# Altium PCB EEG_F4.PcbDoc
Units mil, origin at the board's own origin, x right, y up, seen from the top; angles counter-clockwise.
Board outline 3937.01 x 3149.61 mil, 2 copper layers (Top Layer, Bottom Layer); 136 components, 108 nets, 645 pads, 0 vias.
Unrouted connection lines stored in the file: 354.
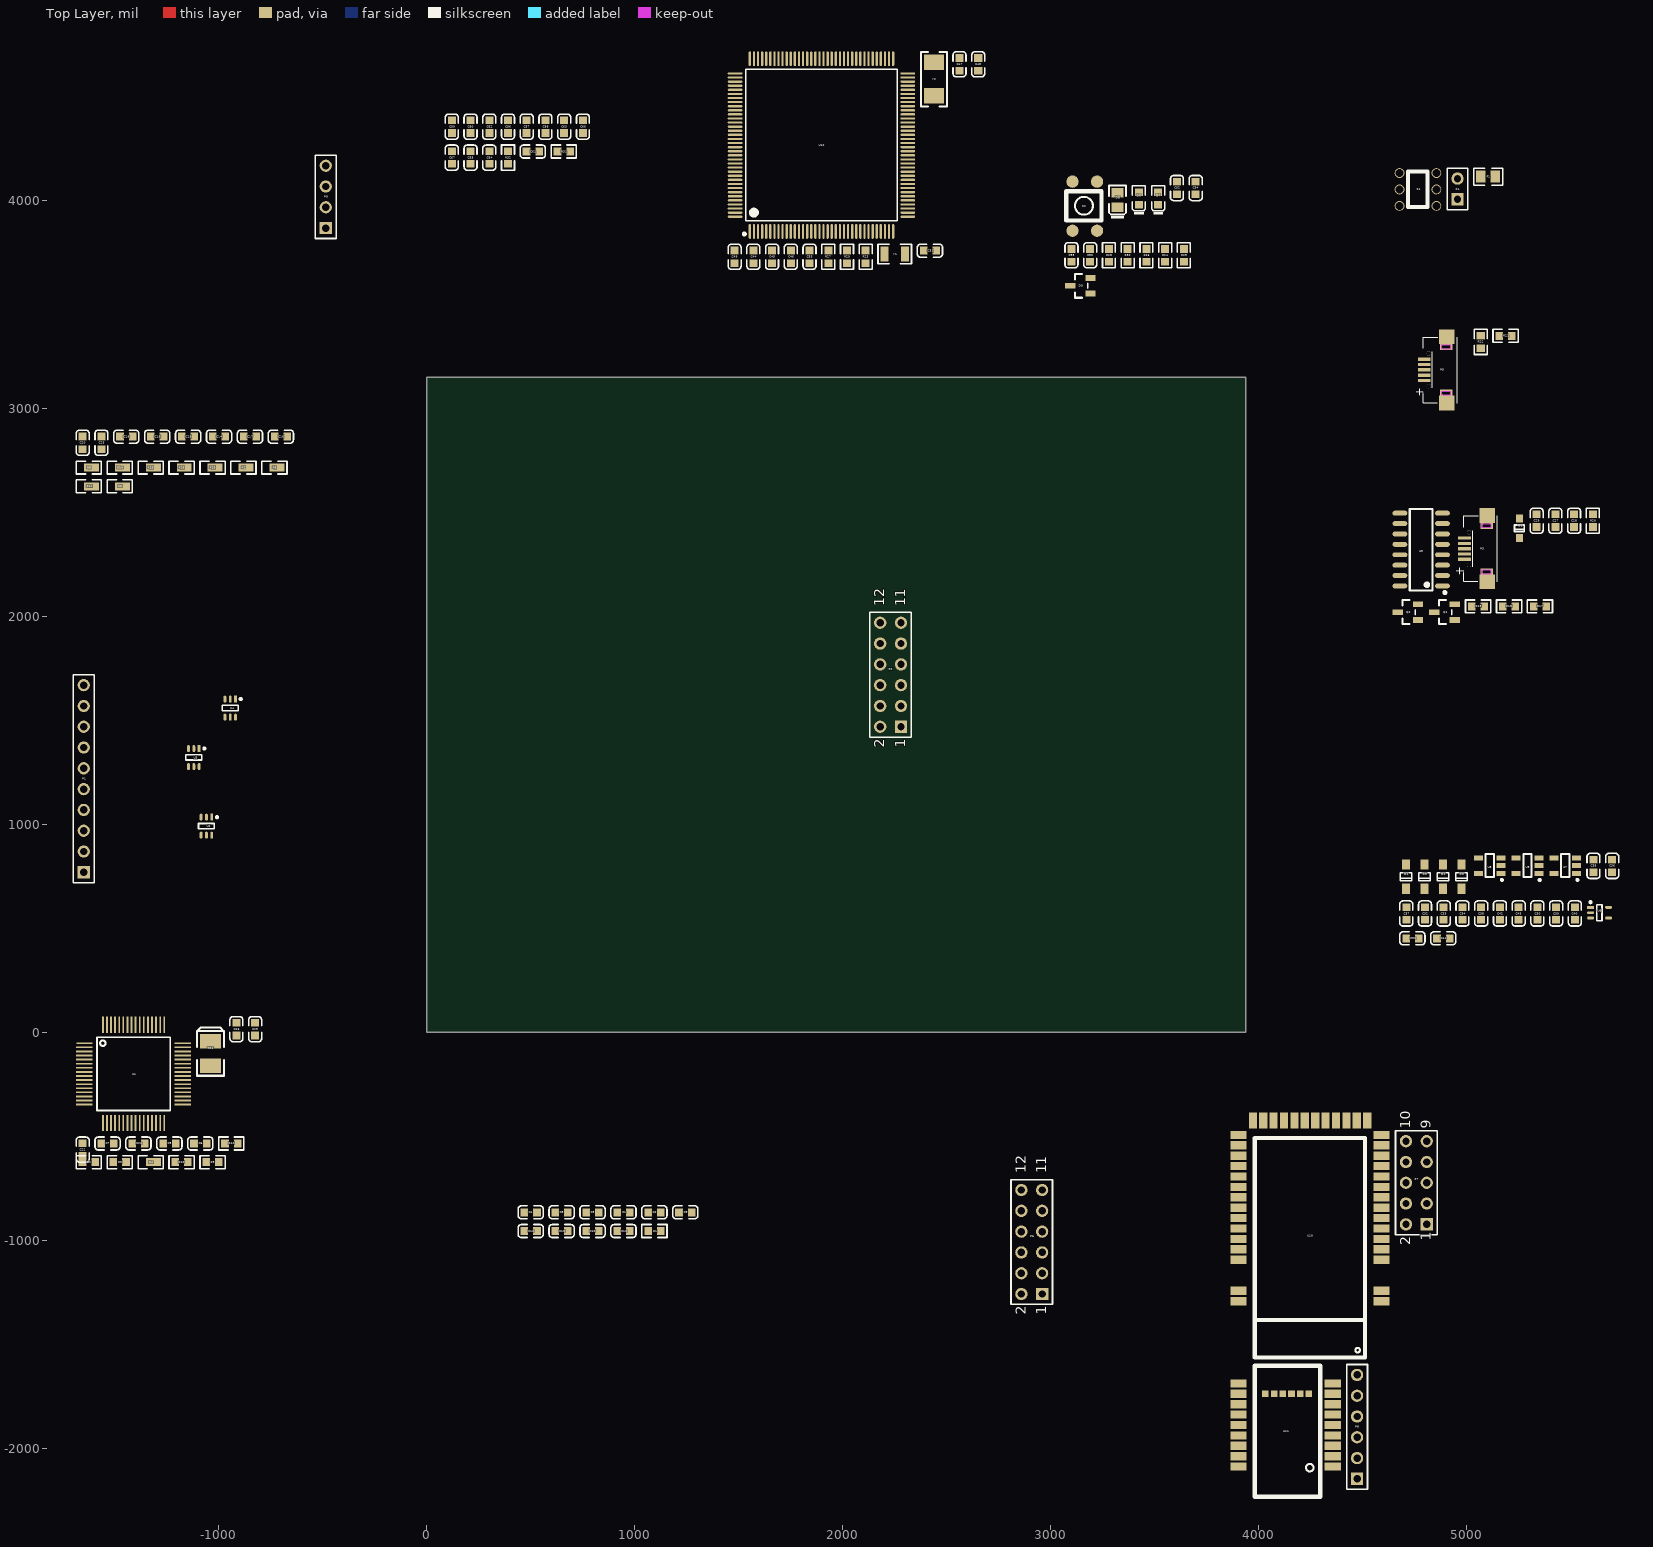
[diagram p0: Top Layer view]
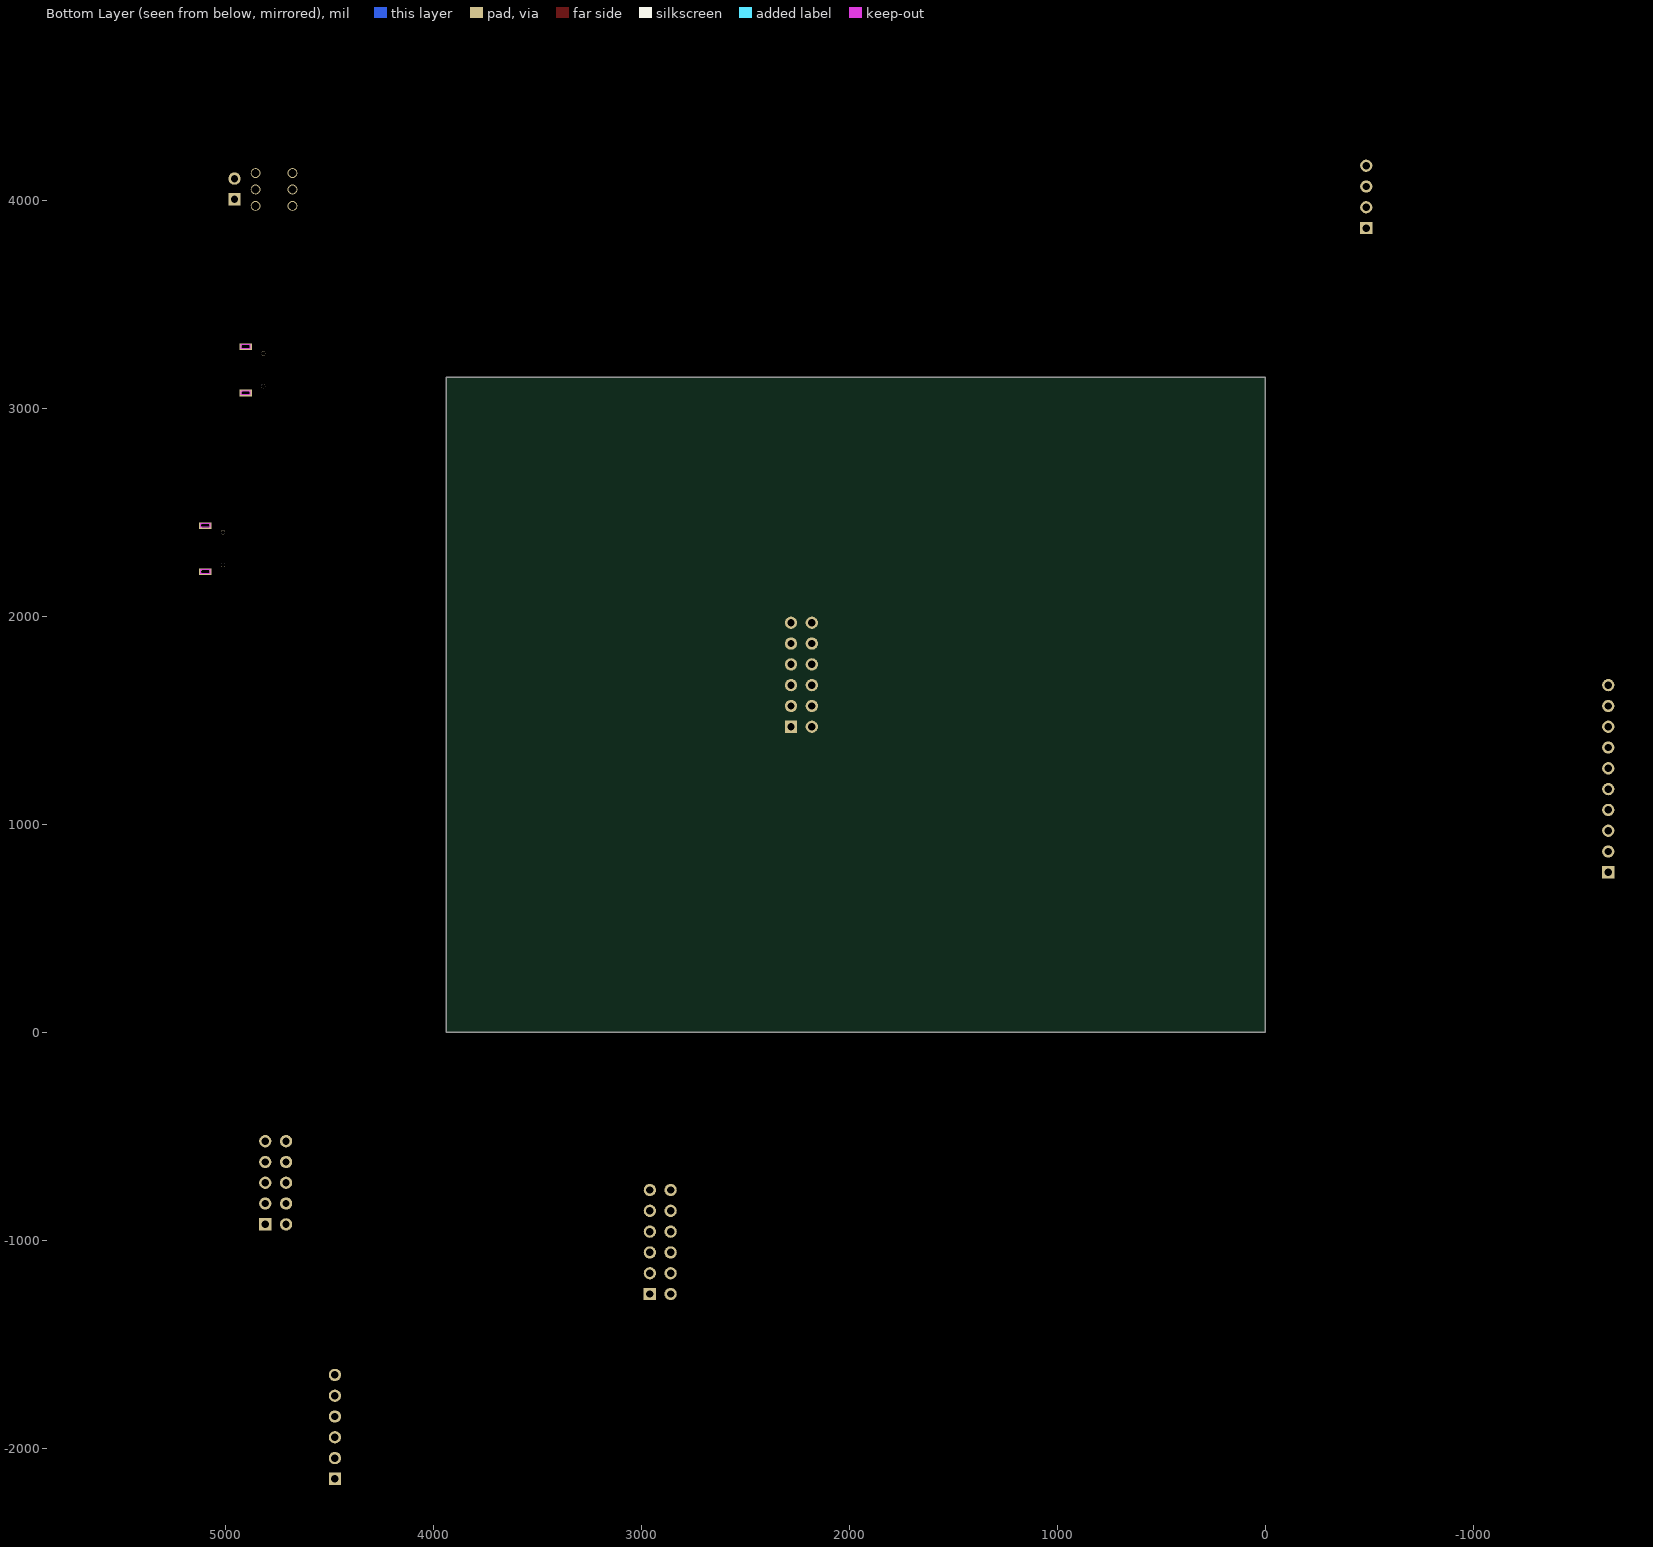
[diagram p1: Bottom Layer view, seen from below]

## Layer stack, top to bottom
Top Solder: solder mask 0.4, Solder Resist, Dk 3.5
Top Layer: signal copper 1.4
Dielectric 1: dielectric 12.6, FR-4, Dk 4.8
Bottom Layer: signal copper 1.4
Bottom Solder: solder mask 0.4, Solder Resist, Dk 3.5

## Board outline
0,0 3937.01,0 3937.01,3149.61 0,3149.61

## Design rules (kind name [scope] priority, off if disabled: settings)
Clearance [All] p1: gap=6 ignorepadtopadclearanceinfootprint=FALSE
PlaneClearance [All] p1: clearance=8
PolygonConnect [All] p1: connectstyle=Direct reliefconductorwidth=10 reliefentries=4 polygonreliefangle="90 Angle" airgapwidth=10
RoutingVias [All] p1: holewidth=12 width=22 viastyle="Through Hole" minholewidth=12 minwidth=22 maxholewidth=12 maxwidth=22
SolderMaskExpansion [All] p1: expansion=4
Width [All] p1: maxlimit=10 minlimit=6 preferedwidth=10
29 further rules are at their usual default settings.

## Classes and differential pairs
component class STM32F4: C44 C45 C46 C47 C48 C49 C50 C51 C52 C53 C54 C55 C56 C57 C58 C59 C60 C61 C62 C63 C64 C65 C66 C67 D6 D7 D8 D9 P9 R23 R24 R25 R26 R27 R28 R29 R30 R31 R32 S2 U12 Y1 Y2
component class pwr: C27 C28 C29 C30 C31 C32 C33 C34 C35 C36 C37 C38 C39 C40 C41 C42 C43 D1 D2 D3 D4 D5 F1 P3 P4 P5 P6 Q1 Q2 R17 R18 R19 R20 R21 R22 S1 U5 U6 U7 U8 U9
component class EEG: C1 C2 C3 C4 C5 C6 C7 C8 C9 C10 C11 C12 C13 C14 C15 C16 C17 C18 C19 C20 C21 C22 C23 C24 C25 C26 P1 P2 R1 R2 R3 R4 R5 R6 R7 R8 R9 R10 R11 R12 R13 R14 R15 R16 U1 U2 U3 U4
component class ble: P7 P8 U10 U11

## Components (designator, comment, footprint, x,y, rotation, side; value= is the part's Value field where it differs from the comment)
C1 "1uF 50V" 0603_C 945.59,-865.04 r0 top
C2 "100nF 50V" 0603_C 1094.33,-865.04 r0 top
C3 "1uF 50V" 0603_C 796.85,-865.04 r0 top
C4 "100nF 50V" 0603_C 499.37,-865.04 r0 top
C5 "1uF 50V" 0603_C -1238.07,-534.22 r0 top
C6 "100nF 50V" 0603_C -1089.33,-534.22 r0 top
C7 "1.5nF" 0603_C -1535.55,-534.22 r0 top
C8 "1uF 50V" 0603_C 648.11,-865.04 r0 top
C9 "100nF 50V" 0603_C 1243.07,-865.04 r0 top
C10 "1uF 50V" 0603_C 796.85,-955.12 r0 top
C11 "100nF 50V" 0603_C 945.59,-955.12 r0 top
C12 "1uF 50V" 0603_C 499.37,-955.12 r0 top
C13 "100nF 50V" 0603_C 648.11,-955.12 r0 top
C14 "4.7nF 50V" 0603_C -999.25,2864.96 r0 top
C15 "4.7nF 50V" 0603_C -1147.99,2864.96 r0 top
C16 "4.7nF 50V" 0603_C -701.77,2864.96 r0 top
C17 "4.7nF 50V" 0603_C -850.51,2864.96 r0 top
C18 "4.7nF 50V" 0603_C -1445.47,2864.96 r0 top
C19 "4.7nF 50V" 0603_C -1296.73,2864.96 r0 top
C20 "4.7nF 50V" 0603_C -1654.96,2835.63 r90 top
C21 "1uF 50V" 0603_C -1386.81,-534.22 r0 top
C22 "1uF 50V" 0603_C -1654.96,-563.55 r90 top
C23 "4.7nF 50V" 0603_C -1564.88,2835.63 r90 top
C24 "100uF (107) ±10% 6.3V" CASE-B_3528 -1040.86,-101.17 r90 top
C25 "10uF" 0603_C -825.78,15.63 r90 top
C26 "100nF 50V" 0603_C -915.86,15.63 r90 top
C27 "10uF (106) 10% 10V" 0603_C 5427.02,2460.63 r90 top
C28 "100nF (104) 10% 50V" 0603_C 5517.1,2460.63 r90 top
C29 "100nF" 0603_C 5336.94,2460.63 r90 top
C30 "1uF" 0603_C 5340.59,571.97 r90 top
C31 "1uF" 0603_C 4739.37,452.56 r0 top
C32 "1nF" 0603_C 4800.12,571.97 r90 top
C33 "1uF" 0603_C 4890.2,571.97 r90 top
C34 "1uF" 0603_C 4980.28,571.97 r90 top
C35 "1nF" 0603_C 5610.26,800.63 r90 top
C36 "1uF" 0603_C 5700.34,800.63 r90 top
C37 "1uF" 0603_C 4710.04,571.97 r90 top
C38 "10nF" 0603_C 5070.36,571.97 r90 top
C39 "1uF" 0603_C 5430.67,571.97 r90 top
C40 "10nF" 0603_C 5520.75,571.97 r90 top
C41 "1uF" 0603_C 4888.11,452.56 r0 top
C42 "10nF" 0603_C 5160.43,571.97 r90 top
C43 "1nF" 0603_C 5250.51,571.97 r90 top
C44 "10pF" 0603_C 1570.12,3730.06 r90 top
C45 "10pF" 0603_C 1660.2,3730.06 r90 top
C46 "22pF" 0603_C 1750.28,3730.06 r90 top
C47 "22pF" 0603_C 2561.6,4655.63 r90 top
C48 "10uF  10V" 0603_C 2651.68,4655.63 r90 top
C49 "100nF  50V" 0603_C 1480.04,3730.06 r90 top
C50 "100nF  50V" 0603_C 3190.12,3737.35 r90 top
C51 "2.2uF 16V" 0603_C 2419.29,3759.39 r0 top
C52 "100nF  50V" 0603_C 3607.27,4060.63 r90 top
C53 "2.2uF (225) 10% 16V" 0603_C 1840.36,3730.06 r90 top
C54 "10uF  10V" 0603_C 3697.35,4060.63 r90 top
C55 "100nF  50V" 0603_C 3100.04,3737.35 r90 top
C56 "100nF  50V" 0603_C 390.28,4355.63 r90 top
C57 "100nF  50V" 0603_C 480.36,4355.63 r90 top
C58 "100nF  50V" 0603_C 570.43,4355.63 r90 top
C59 "100nF  50V" 0603_C 120.04,4355.63 r90 top
C60 "100nF  50V" 0603_C 210.12,4355.63 r90 top
C61 "100nF  50V" 0603_C 509.69,4236.22 r0 top
C62 "100nF  50V" 0603_C 300.2,4355.63 r90 top
C63 "100nF  50V" 0603_C 660.51,4355.63 r90 top
C64 "100nF  50V" 0603_C 300.2,4206.89 r90 top
C65 "100nF  50V" 0603_C 210.12,4206.89 r90 top
C66 "100nF  50V" 0603_C 750.59,4355.63 r90 top
C67 "100nF  50V" 0603_C 120.04,4206.89 r90 top
D1 "1N4148WS T4" SOD-323 5254.34,2424.61 r90 top
D2 "MMSZ4685T1G(3.6V)" SOD-123 4887.24,748.86 r90 top
D3 "MMSZ4683T1G(3V)" SOD-123 4976.14,748.86 r90 top
D4 "MBR0520LT1G" SOD-123 4709.45,748.86 r90 top
D5 "MMSZ4683T1G(3V)" SOD-123 4798.35,748.86 r90 top
D6 "绿灯 0603" 0603_LED_S1 3424.08,4010.76 r90 top
D7 "绿灯 0603" 0603_LED_S1 3517.19,4010.76 r90 top
D8 "红灯 0805" 0805_LED_S1 3321.32,4002.89 r90 top
D9 "BAV70 A4" SOT-23(SOT-23-3) 3142.82,3590.5 r0 top
F1 "Fuse 1A" 0805_R 5103.91,4115.32 r0 top
P1 "Header 10" HDR1X10 -1650,770 r90 top
P2 "Header 6X2" HDR2X6 2280,1470 r90 top
P3 "USB" MICRO-USB 5076.78,2326.12 r90 top
P4 "Header 2" HDR1X2 4956.35,4006.06 r90 top
P5 "USB" MICRO-USB 4883.19,3186.12 r90 top
P6 "Header 6X2" HDR2X6 2958.94,-1257.98 r90 top
P7 "Header 5X2" HDR2X5 4808.47,-922.98 r90 top
P8 "HC-05_CON" HDR1X6 4473.43,-2146.99 r90 top
P9 "SWD" HDR1X4 -485.92,3868.01 r90 top
Q1 "SS8050 Y1" SOT-23(SOT-23-3) 4893.46,2021.06 r0 top
Q2 "SS8550 Y2" SOT-23(SOT-23-3) 4717.82,2021.06 r0 top
R1 "0Ω" 0603_R#1 1094.33,-955.12 r0 top
R2 "1MΩ" 0603_R#1 -1625.63,-624.3 r0 top
R3 "10KΩ" 0603_R#1 -1476.89,-624.3 r0 top
R4 "100KΩ" 0603_R#2 -1328.15,-624.3 r0 top
R5 "4.99KΩ" 0603_R#2 -1625.63,2716.22 r0 top
R6 "4.99KΩ" 0603_R#2 -733.19,2716.22 r0 top
R7 "4.99KΩ" 0603_R#2 -881.93,2716.22 r0 top
R8 "4.99KΩ" 0603_R#2 -1476.89,2626.14 r0 top
R9 "0Ω" 0603_R#1 -1030.67,-624.3 r0 top
R10 "0Ω" 0603_R#1 -1179.41,-624.3 r0 top
R11 "4.99KΩ" 0603_R#2 -1625.63,2626.14 r0 top
R12 "0Ω" 0603_R#1 -940.59,-534.22 r0 top
R13 "4.99KΩ" 0603_R#2 -1328.15,2716.22 r0 top
R14 "4.99KΩ" 0603_R#2 -1476.89,2716.22 r0 top
R15 "4.99KΩ" 0603_R#2 -1030.67,2716.22 r0 top
R16 "4.99KΩ" 0603_R#2 -1179.41,2716.22 r0 top
R17 "10KΩ" 0603_R#1 5353.13,2048.5 r0 top
R18 "1KΩ (1001) ±1%" 0603_R#1 5204.39,2048.5 r0 top
R19 "1KΩ (1001) ±1%" 0603_R#1 5055.65,2048.5 r0 top
R20 "1KΩ (1001) ±1%" 0603_R#1 5607.18,2460.63 r90 top
R21 "10Ω" 0603_R#1 5187.64,3349.96 r0 top
R22 "10Ω" 0603_R#1 5068.23,3320.63 r90 top
R23 "0Ω" 0603_R#1 2110.59,3730.06 r90 top
R24 "510Ω" 0603_R#1 3550.43,3737.35 r90 top
R25 "510Ω" 0603_R#1 3640.51,3737.35 r90 top
R26 "1KΩ" 0603_R#1 3460.36,3737.35 r90 top
R27 "1MΩ" 0603_R#1 1930.43,3730.06 r90 top
R28 "10K" 0603_R#1 3280.2,3737.35 r90 top
R29 "10Ω" 0603_R#1 2020.51,3730.06 r90 top
R30 "10Ω (10R0) ±1%" 0603_R#1 3370.28,3737.35 r90 top
R31 "10K" 0603_R#1 658.43,4236.22 r0 top
R32 "10K" 0603_R#1 390.28,4206.89 r90 top
S1 "SW-PB" KEY_5.8*5.8 4677.62,3974.9 r0 top
S2 "SW-PB" key_4.5*4.5*3.8 3105,3855.25 r90 top
U1 "ADS1299" ADS1299 -1716.63,48.05 r0 top
U2 "TPD4E1B06DCKR" TPD4 -1034.41,1035 r270 top
U3 "TPD4E1B06DCKR" TPD4 -1095,1365 r270 top
U4 "TPD4E1B06DCKR" TPD4 -920,1602.68 r270 top
U5 "CH340G" SOIC-16_150mil 4781.8,2322.05 r90 top
U6 "TPS71733DCKR" SC-70-5 5596.52,601.34 r0 top
U7 "TPS73225" SOT-23-5 5474.45,802.01 r0 top
U8 "TPS60403" SOT-23-5 5111.36,802.01 r0 top
U9 "TPS72325" SOT-23-5 5292.91,802.01 r0 top
U10 "CC2640R2F" CC2640R2F 5106.17,-783.06 r0 top
U11 "nRF52832" nRF52832 4166.13,-1903.06 r0 top
U12 "STM32F429ZGT6" LQFP-144_20x20x05P 1897.79,4267.21 r0 top
Y1 "32.768KHz" "SMD-3215_2P FC - 135" 2250.28,3743.24 r0 top
Y2 "8MHz" SMD-5032_2P 2438.57,4584.09 r90 top

## Footprints (in the part's own frame and the unit in brackets; to place one, negate y for a bottom-side part, rotate by r counter-clockwise, add the part's x,y. Pads: shape width x height; smd on the part's side, far side on the other; paste and mask are expansions set on the pad)
0603_C [mm]
  rect 0.93x0.98 smd: 1(-0.77,0) 2(0.77,0)
  silkscreen extent -1.53,-0.79 1.54,0.79, body extent -0.8,-0.4 0.8,0.4, height 0.3
0603_LED_S1 [mm]
  rect 0.93x0.98 smd: A(0.77,0) K(-0.77,0)
  silkscreen extent -1.98,-0.79 1.54,0.79, body extent -0.8,-0.4 0.8,0.4, height 0.6
0603_R#1 [mm]
  rect 0.93x0.98 smd: 1(-0.77,0) 2(0.77,0)
  silkscreen extent -1.53,-0.79 1.54,0.79, body extent -0.85,-0.4 0.85,0.4, height 0.56
0603_R#2 [mm]
  rect 0.93x0.98 smd: 1(-0.123,0) 2(0.77,0)
  silkscreen extent -1.53,-0.79 1.54,0.79, body extent -0.85,-0.4 0.85,0.4, height 0.56
0805_LED_S1 [mm]
  rect 1.16x1.47 smd: A(0.89,0) K(-0.89,0)
  silkscreen extent -2.24,-1.04 1.77,1.03, body extent -1.01,-0.62 1.01,0.62, height 1.1
0805_R [mm]
  rect 1.16x1.47 smd: 1(-0.89,0) 2(0.89,0)
  silkscreen extent -1.77,-1.04 1.77,1.03, body extent -1,-0.62 1,0.63, height 0.49
ADS1299 [mm]
  oval 2x0.22 smd: 1(1.778,-2.54)
  rect 2x0.22 smd: 2(1.778,-3.04) 3(1.778,-3.54) 4(1.778,-4.04) 5(1.778,-4.54) 6(1.778,-5.04) 7(1.778,-5.54) 8(1.778,-6.04) 9(1.778,-6.54) 10(1.778,-7.04) 11(1.778,-7.54) 12(1.778,-8.04) 13(1.778,-8.54) 14(1.778,-9.04) 15(1.778,-9.54) 16(1.778,-10.04) 33(13.778,-10.04) 34(13.778,-9.54) 35(13.778,-9.04) 36(13.778,-8.54) 37(13.778,-8.04) 38(13.778,-7.54) 39(13.778,-7.04) 40(13.778,-6.54) 41(13.778,-6.04) 42(13.778,-5.54) 43(13.778,-5.04) 44(13.778,-4.54) 45(13.778,-4.04) 46(13.778,-3.54) 47(13.778,-3.04) 48(13.778,-2.54)
  rect 0.22x2 smd: 17(4.028,-12.29) 18(4.528,-12.29) 19(5.028,-12.29) 20(5.528,-12.29) 21(6.028,-12.29) 22(6.528,-12.29) 23(7.028,-12.29) 24(7.528,-12.29) 25(8.028,-12.29) 26(8.528,-12.29) 27(9.028,-12.29) 28(9.528,-12.29) 29(10.028,-12.29) 30(10.528,-12.29) 31(11.028,-12.29) 32(11.528,-12.29) 49(11.528,-0.29) 50(11.028,-0.29) 51(10.528,-0.29) 52(10.028,-0.29) 53(9.528,-0.29) 54(9.028,-0.29) 55(8.528,-0.29) 56(8.028,-0.29) 57(7.528,-0.29) 58(7.028,-0.29) 59(6.528,-0.29) 60(6.028,-0.29) 61(5.528,-0.29) 62(5.028,-0.29) 63(4.528,-0.29) 64(4.028,-0.29)
  silkscreen extent 3.31,-10.75 12.24,-1.83
CASE-B_3528 [mm]
  rect 1.8x2.6 smd: 1(1.5,0) 2(-1.5,0)
  silkscreen extent -2.73,-1.65 3.16,1.65, body extent -1.85,-1.47 1.85,1.46, height 2.03
CC2640R2F [mm]
  rect 2x1 smd: 1(-13.081,-12.944) 2(-13.081,-11.674) 3(-13.081,-7.874) 4(-13.081,-6.604) 5(-13.081,-5.334) 6(-13.081,-4.064) 7(-13.081,-2.794) 8(-13.081,-1.524) 9(-13.081,-0.254) 10(-13.081,1.016) 11(-13.081,2.286) 12(-13.081,3.556) 13(-13.081,4.826) 14(-13.081,6.096) 15(-13.081,7.366) 28(-30.551,7.366) 29(-30.551,6.096) 30(-30.551,4.826) 31(-30.551,3.556) 32(-30.551,2.286) 33(-30.551,1.016) 34(-30.551,-0.254) 35(-30.551,-1.524) 36(-30.551,-2.794) 37(-30.551,-4.064) 38(-30.551,-5.334) 39(-30.551,-6.604) 40(-30.551,-7.874) 41(-30.551,-11.674) 42(-30.551,-12.944)
  rect 1x2 smd: 16(-14.831,9.136) 17(-16.101,9.136) 18(-17.371,9.136) 19(-18.641,9.136) 20(-19.911,9.136) 21(-21.181,9.136) 22(-22.451,9.136) 23(-23.721,9.136) 24(-24.991,9.136) 25(-26.261,9.136) 26(-27.531,9.136) 27(-28.801,9.136)
  silkscreen extent -28.57,-19.81 -15.11,6.98
HDR1X2 [mm] "Connector; Header; 2 Position"
  rect 1.5x1.5 hole 0.9: 1(0,0)
  round 1.5 hole 0.9: 2(2.54,0)
  silkscreen extent -1.27,-1.27 3.81,1.27
HDR1X4 [mm] "Connector; Header; 4 Position"
  rect 1.5x1.5 hole 0.9: 1(0,0)
  round 1.5 hole 0.9: 2(2.54,0) 3(5.08,0) 4(7.62,0)
  silkscreen extent -1.27,-1.27 8.89,1.27
HDR1X6 [mm] "Connector; Header; 6 Position"
  rect 1.5x1.5 hole 0.9: 1(0,0)
  round 1.5 hole 0.9: 2(2.54,0) 3(5.08,0) 4(7.62,0) 5(10.16,0) 6(12.7,0)
  silkscreen extent -1.27,-1.27 13.97,1.27
HDR1X10 [mm] "Connector; Header; 10 Position"
  rect 1.5x1.5 hole 0.9: 1(0,0)
  round 1.5 hole 0.9: 2(2.54,0) 3(5.08,0) 4(7.62,0) 5(10.16,0) 6(12.7,0) 7(15.24,0) 8(17.78,0) 9(20.32,0) 10(22.86,0)
  silkscreen extent -1.27,-1.27 24.13,1.27
HDR2X5 [mm] "Connector; Header; 5x2 Position"
  rect 1.5x1.5 hole 0.9: 1(0,0)
  round 1.5 hole 0.9: 2(0,2.54) 3(2.54,0) 4(2.54,2.54) 5(5.08,0) 6(5.08,2.54) 7(7.62,0) 8(7.62,2.54) 9(10.16,0) 10(10.16,2.54)
  silkscreen extent -1.27,-1.27 11.43,3.81
HDR2X6 [mm] "Connector; Header; 6x2 Position"
  rect 1.5x1.5 hole 0.9: 1(0,0)
  round 1.5 hole 0.9: 2(0,2.54) 3(2.54,0) 4(2.54,2.54) 5(5.08,0) 6(5.08,2.54) 7(7.62,0) 8(7.62,2.54) 9(10.16,0) 10(10.16,2.54) 11(12.7,0) 12(12.7,2.54)
  silkscreen extent -1.27,-1.27 13.97,3.81
key_4.5*4.5*3.8 [mm]
  round 1.5 smd: 1(0,0) 2(0,-3) ""(6,-3) ""(6,0)
  silkscreen extent 1.27,-3.56 4.83,0.76
KEY_5.8*5.8 [mm] "KEY_5.8*5.8"
  round 1.2 hole 1: 1(0,0) 2(0,2) 3(0,4) 4(4.5,4) 5(4.5,2) 6(4.5,0)
  silkscreen extent 1.02,-0.13 3.43,4.19
LQFP-144_20x20x05P [mm]
  oval 0.28x1.8 smd mask+0.051: 1(-8.75,-10.55) 2(-8.25,-10.55) 3(-7.75,-10.55) 4(-7.25,-10.55) 5(-6.75,-10.55) 6(-6.25,-10.55) 7(-5.75,-10.55) 8(-5.25,-10.55) 9(-4.75,-10.55) 10(-4.25,-10.55) 11(-3.75,-10.55) 12(-3.25,-10.55) 13(-2.75,-10.55) 14(-2.25,-10.55) 15(-1.75,-10.55) 16(-1.25,-10.55) 17(-0.75,-10.55) 18(-0.25,-10.55) 19(0.25,-10.55) 20(0.75,-10.55) 21(1.25,-10.55) 22(1.75,-10.55) 23(2.25,-10.55) 24(2.75,-10.55) 25(3.25,-10.55) 26(3.75,-10.55) 27(4.25,-10.55) 28(4.75,-10.55) 29(5.25,-10.55) 30(5.75,-10.55) 31(6.25,-10.55) 32(6.75,-10.55) 33(7.25,-10.55) 34(7.75,-10.55) 35(8.25,-10.55) 36(8.75,-10.55) 73(8.75,10.55) 74(8.25,10.55) 75(7.75,10.55) 76(7.25,10.55) 77(6.75,10.55) 78(6.25,10.55) 79(5.75,10.55) 80(5.25,10.55) 81(4.75,10.55) 82(4.25,10.55) 83(3.75,10.55) 84(3.25,10.55) 85(2.75,10.55) 86(2.25,10.55) 87(1.75,10.55) 88(1.25,10.55) 89(0.75,10.55) 90(0.25,10.55) 91(-0.25,10.55) 92(-0.75,10.55) 93(-1.25,10.55) 94(-1.75,10.55) 95(-2.25,10.55) 96(-2.75,10.55) 97(-3.25,10.55) 98(-3.75,10.55) 99(-4.25,10.55) 100(-4.75,10.55) 101(-5.25,10.55) 102(-5.75,10.55) 103(-6.25,10.55) 104(-6.75,10.55) 105(-7.25,10.55) 106(-7.75,10.55) 107(-8.25,10.55) 108(-8.75,10.55)
  oval 1.8x0.28 smd mask+0.051: 37(10.55,-8.75) 38(10.55,-8.25) 39(10.55,-7.75) 40(10.55,-7.25) 41(10.55,-6.75) 42(10.55,-6.25) 43(10.55,-5.75) 44(10.55,-5.25) 45(10.55,-4.75) 46(10.55,-4.25) 47(10.55,-3.75) 48(10.55,-3.25) 49(10.55,-2.75) 50(10.55,-2.25) 51(10.55,-1.75) 52(10.55,-1.25) 53(10.55,-0.75) 54(10.55,-0.25) 55(10.55,0.25) 56(10.55,0.75) 57(10.55,1.25) 58(10.55,1.75) 59(10.55,2.25) 60(10.55,2.75) 61(10.55,3.25) 62(10.55,3.75) 63(10.55,4.25) 64(10.55,4.75) 65(10.55,5.25) 66(10.55,5.75) 67(10.55,6.25) 68(10.55,6.75) 69(10.55,7.25) 70(10.55,7.75) 71(10.55,8.25) 72(10.55,8.75) 109(-10.55,8.75) 110(-10.55,8.25) 111(-10.55,7.75) 112(-10.55,7.25) 113(-10.55,6.75) 114(-10.55,6.25) 115(-10.55,5.75) 116(-10.55,5.25) 117(-10.55,4.75) 118(-10.55,4.25) 119(-10.55,3.75) 120(-10.55,3.25) 121(-10.55,2.75) 122(-10.55,2.25) 123(-10.55,1.75) 124(-10.55,1.25) 125(-10.55,0.75) 126(-10.55,0.25) 127(-10.55,-0.25) 128(-10.55,-0.75) 129(-10.55,-1.25) 130(-10.55,-1.75) 131(-10.55,-2.25) 132(-10.55,-2.75) 133(-10.55,-3.25) 134(-10.55,-3.75) 135(-10.55,-4.25) 136(-10.55,-4.75) 137(-10.55,-5.25) 138(-10.55,-5.75) 139(-10.55,-6.25) 140(-10.55,-6.75) 141(-10.55,-7.25) 142(-10.55,-7.75) 143(-10.55,-8.25) 144(-10.55,-8.75)
  silkscreen extent -9.57,-11 9.25,9.25
MICRO-USB [mm]
  rect 0.4x1.55 smd: 1(-1.3,2.2) 2(-0.65,2.2) 3(0,2.2) 4(0.65,2.2) 5(1.3,2.2)
  rect 1.8x1.9 smd: 6(-4.05,-0.55) 6(4.05,-0.55)
  rect 0.8x1.5 hole 0.4 slot 1 at 90 deg: 6(-2.825,-0.5) 6(2.825,-0.5)
  round 0.5 hole 0.5 unplated: ""(-2,1.65) ""(2,1.65)
  Keep-Out Layer lines w0.127: -3.054,0.075 -2.596,0.075 -2.596,-1.043 -3.054,-1.043 -3.054,0.075 ; 2.596,0.075 3.054,0.075 3.054,-1.043 2.596,-1.043 2.596,0.075
  silkscreen extent -4.05,-1.8 4,2.3, body extent -4.03,-3.3 4.03,2.28, height 3.13
nRF52832 [mm]
  rect 2x1 smd: 1(4.826,-4.699) 2(4.826,-3.429) 3(4.826,-2.159) 4(4.826,-0.889) 5(4.826,0.381) 6(4.826,1.651) 7(4.826,2.921) 8(4.826,4.191) 9(4.826,5.461) 16(-6.674,5.461) 17(-6.674,4.191) 18(-6.674,2.921) 19(-6.674,1.651) 20(-6.674,0.381) 21(-6.674,-0.889) 22(-6.674,-2.159) 23(-6.674,-3.429) 24(-6.674,-4.699)
  rect 0.8x0.8 smd: 10(1.93,4.191) 11(0.864,4.191) 12(-0.203,4.191) 13(-1.27,4.191) 14(-2.337,4.191) 15(-3.404,4.191)
  silkscreen extent -4.7,-8.38 3.3,7.62
SC-70-5 [mm]
  rect 0.85x0.35 smd: 1(0,0)
  oval 0.85x0.35 smd: 2(0,-0.65) 3(0,-1.3) 4(2.2,-1.3) 5(2.2,0)
  silkscreen extent -0.13,-1.63 1.4,0.76
"SMD-3215_2P FC - 135" [mm]
  rect 1x1.8 smd: 1(-1.25,0) 2(1.25,0)
  silkscreen extent -2.05,-1.2 2.05,1.2
SMD-5032_2P [mm]
  rect 1.9x2.4 smd: 1(-2.05,0) 2(2.05,0)
  silkscreen extent -3.32,-1.6 3.32,1.6
SOD-123 [mm]
  rect 1.25x1 smd: 1(1.475,0) 2(-1.475,0)
  silkscreen extent -0.5,-0.7 0.5,0.7, body extent -1.85,-0.77 1.85,0.78, height 1.35
SOD-323 [mm]
  rect 1x0.83 smd: 1(1.18,0) 2(-1.18,0)
  silkscreen extent -0.4,-0.6 0.4,0.6, body extent -1.35,-0.62 1.35,0.63, height 1.1
SOIC-16_150mil [mm]
  oval 0.6x1.8 smd: 1(-4.445,-2.6) 2(-3.175,-2.6) 3(-1.905,-2.6) 4(-0.635,-2.6) 5(0.635,-2.6) 6(1.905,-2.6) 7(3.175,-2.6) 8(4.445,-2.6) 9(4.445,2.6) 10(3.175,2.6) 11(1.905,2.6) 12(0.635,2.6) 13(-0.635,2.6) 14(-1.905,2.6) 15(-3.175,2.6) 16(-4.445,2.6)
  silkscreen extent -5.4,-3.05 4.97,1.4
SOT-23(SOT-23-3) [mm]
  rect 1.25x0.7 smd: 1(1.25,-0.95) 2(1.25,0.95) 3(-1.25,0)
  silkscreen extent -0.65,-1.46 0.9,1.46, body extent -1.5,-1.5 1.5,1.5, height 1.3
SOT-23-5 [mm]
  rect 1.1x0.6 smd: 1(1.4,-0.95) 2(1.4,0) 3(1.4,0.95) 4(-1.4,0.95) 5(-1.4,-0.95)
  silkscreen extent -0.5,-1.87 1.63,1.4
TPD4 [mm]
  rect 0.85x0.35 smd: 1(0,0)
  oval 0.85x0.35 smd: 2(0,-0.65) 3(0,-1.3) 4(2.2,-1.3) 5(2.2,-0.65) 6(2.2,0)
  silkscreen extent -0.13,-1.63 1.4,0.76

## Part data
C1 C2 C3 C4 C5 C6 C7 C8 C9 C10 C11 C12 C13 C21 C22 C26 C38 C40 C42: library part "0603 10nF (103) 10% 50V", "贴片电容", Package=0603, SuppliersPartNumber=C57112, ComponentLink1Description=供应商, ComponentLink1URL=http://www.szlcsc.com/product/details_58143.html, Supplier=LC
C14 C15 C16 C17 C18 C19 C20 C23: library part "0603 4.7nF (472) 10% 50V", "贴片电容", Package=0603, SuppliersPartNumber=C53987, ComponentLink1Description=供应商, ComponentLink1URL=http://www.szlcsc.com/product/details_55004.html, Supplier=LC
C24: library part "3528 100uF (107) 10% 6.3V", "钽电容", Package=3528, SuppliersPartNumber=C16133, ComponentLink1Description=供应商, ComponentLink1URL=http://www.szlcsc.com/product/details_16815.html, Supplier=LC
C25 C27 C48 C54: library part "0603 10uF (106) 10% 10V", "贴片电容", Package=0603, SuppliersPartNumber=C19702, ComponentLink1Description=供应商, ComponentLink1URL=http://www.szlcsc.com/product/details_20411.html, Supplier=LC
C28 C29 C49 C50 C52 C55 C56 C57 C58 C59 C60 C61 C62 C63 C64 C65 C66 C67: library part "0603 100nF (104) 10% 50V", "贴片电容", Package=0603, SuppliersPartNumber=C14663, ComponentLink1Description=供应商, ComponentLink1URL=http://www.szlcsc.com/product/details_15331.html, Supplier=LC
C30 C31 C33 C34 C36 C37 C39 C41: library part "0603 1uF (105) 10% 50V", "贴片电容", Package=0603, SuppliersPartNumber=C15849, ComponentLink1Description=供应商, ComponentLink1URL=http://www.szlcsc.com/product/details_16531.html, Supplier=LC
C32 C35 C43: library part "0603 1nF (102) 10% 50V", "贴片电容", Package=0603, SuppliersPartNumber=C1588, ComponentLink1Description=供应商, ComponentLink1URL=http://www.szlcsc.com/product/details_1940.html, Supplier=LC
C44 C45: library part "0603 10pF (100) 5% 50V", "贴片电容", Package=0603, SuppliersPartNumber=C1634, ComponentLink1Description=供应商, ComponentLink1URL=http://www.szlcsc.com/product/details_1986.html, Supplier=LC
C46 C47: library part "0603 22pF (220) 5% 50V", "贴片电容", Package=0603, SuppliersPartNumber=C1653, ComponentLink1Description=供应商, ComponentLink1URL=http://www.szlcsc.com/product/details_2005.html, Supplier=LC
C51 C53: library part "0603 2.2uF (225) 10% 16V", "贴片电容", Package=0603, SuppliersPartNumber=C23630, ComponentLink1Description=供应商, ComponentLink1URL=http://www.szlcsc.com/product/details_24366.html, Supplier=LC
D1: library part "SOD-323 1N4148WS T4", "二极管", Package=SOD-323, SuppliersPartNumber=C2128, ComponentLink1Description=供应商, ComponentLink1URL=http://www.szlcsc.com/product/details_2485.html, Supplier=LC
D2 D3 D4 D5: library part "SOD-123 B5819W  SL", "肖特基二极管", Package=SOD-123, SuppliersPartNumber=C8598, ComponentLink1Description=供应商, ComponentLink1URL=http://www.szlcsc.com/product/details_9093.html, Supplier=LC
D6 D7: library part "0603 绿灯", "发光二极管", Package=0603, SuppliersPartNumber=C72043, ComponentLink1Description=供应商, ComponentLink1URL=http://www.szlcsc.com/product/details_73152.html, Supplier=LC
D8: library part "0805 红灯", "发光二极管", Package=0805, SuppliersPartNumber=C2295, ComponentLink1Description=供应商, ComponentLink1URL=http://www.szlcsc.com/product/details_2668.html, Supplier=LC
D9: library part "SOT-23 BAV70 A4", "开关二极管", Package=SOT-23, SuppliersPartNumber=C68978, ComponentLink1Description=供应商, ComponentLink1URL=http://www.szlcsc.com/product/details_70091.html, Supplier=LC
F1: library part "Fuse 2", "Fuse", LatestRevisionDate=17-Jul-2002, LatestRevisionNote="Re-released for DXP Platform.", PackageDescription="Thru-Hole; 2 Leads", PackageReference=PIN-W2/E2.8, Published=8-Jun-2000, Publisher="Altium Limited"
P1: "Header, 10-Pin", LatestRevisionDate=17-Jul-2002, LatestRevisionNote="Re-released for DXP Platform.", Publisher="Altium Limited"
P2 P6: "Header, 6-Pin, Dual row", LatestRevisionDate=17-Jul-2002, LatestRevisionNote="Re-released for DXP Platform.", Publisher="Altium Limited"
P3 P5: library part "Header 5", "Header, 5-Pin", LatestRevisionDate=17-Jul-2002, LatestRevisionNote="Re-released for DXP Platform.", Publisher="Altium Limited"
P4: "Header, 2-Pin", LatestRevisionDate=17-Jul-2002, LatestRevisionNote="Re-released for DXP Platform.", Publisher="Altium Limited"
P7: "Header, 5-Pin, Dual row", LatestRevisionDate=17-Jul-2002, LatestRevisionNote="Re-released for DXP Platform.", Publisher="Altium Limited"
P8: library part "Header 6", "Header, 6-Pin", LatestRevisionDate=17-Jul-2002, LatestRevisionNote="Re-released for DXP Platform.", Publisher="Altium Limited"
P9: library part "Header 4", "Header, 4-Pin", LatestRevisionDate=17-Jul-2002, LatestRevisionNote="Re-released for DXP Platform.", Publisher="Altium Limited"
Q1: library part "SOT-23 SS8050 Y1", "三极管", Package=SOT-23, SuppliersPartNumber=C2150, ComponentLink1Description=供应商, ComponentLink1URL=http://www.szlcsc.com/product/details_2507.html, Supplier=LC
Q2: library part "SOT-23 SS8550 Y2", "三极管", Package=SOT-23, SuppliersPartNumber=C8542, ComponentLink1Description=供应商, ComponentLink1URL=http://www.szlcsc.com/product/details_9037.html, Supplier=LC
R1 R2 R4: library part "0603 100KΩ (1003) 1%", "贴片电阻", Package=0603, SuppliersPartNumber=C25803, ComponentLink1Description=供应商, ComponentLink1URL=http://www.szlcsc.com/product/details_26546.html, Supplier=LC
R3: library part "0603 10KΩ (1002) 1%", "贴片电阻", Package=0603, SuppliersPartNumber=C25804, ComponentLink1Description=供应商, ComponentLink1URL=http://www.szlcsc.com/product/details_26547.html, Supplier=LC
R5 R6 R7 R8 R11 R13 R14 R15 R16: library part "0603 4.99KΩ (4991) 1%", "贴片电阻", Package=0603, SuppliersPartNumber=C23046, ComponentLink1Description=供应商, ComponentLink1URL=http://www.szlcsc.com/product/details_23773.html, Supplier=LC
R9 R10 R12 R23: library part "0603 0Ω (0R0) 1%", "贴片电阻", Package=0603, SuppliersPartNumber=C21189, ComponentLink1Description=供应商, ComponentLink1URL=http://www.szlcsc.com/product/details_21903.html, Supplier=LC
R17 R18 R19 R20 R26: library part "0603 1KΩ (1001) 1%", "贴片电阻", Package=0603, SuppliersPartNumber=C21190, ComponentLink1Description=供应商, ComponentLink1URL=http://www.szlcsc.com/product/details_21904.html, Supplier=LC
R21 R22 R28 R29 R30 R31 R32: library part "0603 10Ω (10R0) 1%", "贴片电阻", Package=0603, SuppliersPartNumber=C22859, ComponentLink1Description=供应商, ComponentLink1URL=http://www.szlcsc.com/product/details_23586.html, Supplier=LC
R24 R25: library part "0603 510Ω (5100) 1%", "贴片电阻", Package=0603, SuppliersPartNumber=C23193, ComponentLink1Description=供应商, ComponentLink1URL=http://www.szlcsc.com/product/details_23920.html, Supplier=LC
R27: library part "0603 1.2MΩ (1204) 1%", "贴片电阻", Package=0603, SuppliersPartNumber=C22766, ComponentLink1Description=供应商, ComponentLink1URL=http://www.szlcsc.com/product/details_23493.html, Supplier=LC
S1 S2: "Switch", LatestRevisionDate=17-Jul-2002, LatestRevisionNote="Re-released for DXP Platform.", PackageDescription="Switch; 2 Leads", PackageReference=SPST-2, Published=24-Mar-1999, Publisher="Altium Limited"
U5: library part CH340G_[C14267], "USB", Package=SOIC-16_150mil, SuppliersPartNumber=C14267, ComponentLink1Description=供应商, ComponentLink1URL=http://www.szlcsc.com/product/details_14927.html, Supplier=LC
U12: "ARM", Package=LQFP-144_20x20x05P, SuppliersPartNumber=C46525, ComponentLink1Description=供应商, ComponentLink1URL=http://www.szlcsc.com/product/details_47529.html, Supplier=LC
Y1: library part "SMD-3215_2P 32.768KHz 20ppm 12.5pF", "贴片晶振", Package=SMD-3215_2P, SuppliersPartNumber=C32346, ComponentLink1Description=供应商, ComponentLink1URL=http://www.szlcsc.com/product/details_33310.html, Supplier=LC
Y2: library part "SMD-5032_2P 8MHz 20ppm 20pF", "贴片晶振", Package=SMD-5032_2P, SuppliersPartNumber=C115962, ComponentLink1Description=供应商, ComponentLink1URL=http://www.szlcsc.com/product/details_117214.html, Supplier=LC

## Nets (pads, with @x,y where several pads share a name; then routed paths per layer and width w, separated by ;. In a path a pad name is that pad's centre, name@x,y a point inside that pad or via, vN(x,y) a via of type N, cw(c..) or ccw(c..) an arc to the next point about the centre after c; other vN are vias at no path point)
AGND: C8.2 C9.2 C10.2 C11.2 C27.2 C28.2 C29.1 C30.1 C31.1 C32.1 C33.1 C34.1 C35.1 C37.2 C38.1 C39.2 C40.1 C41.2 C42.1 C43.1 C44.1 C45.1 C46.1 C47.1 C48.2 C49.2 C50.1 C51.1 C52.2 C53.1 C54.1 C55.1 C56.1 C57.1 C58.1 C59.1 C60.1 C61.1 C62.1 C63.1 C64.1 C65.1 C66.1 C67.1 D2.1 D3.1 D5.2 D8.K P3.5 P4.2 P5.5 P6.2 P6.4 P6.6 P6.8 P8.4 P9.4 R1.2 R31.1 R32.1 S2.2 U2.3 U3.3 U4.3 U5.1 U6.2 U7.2 U8.4 U9.1 U10.1 U10.2 U10.3 U10.27 U10.40 U10.41 U10.42 U11.1 U11.9 U11.16 U12.16 U12.31 U12.38 U12.51 U12.61 U12.83 U12.94 U12.107 U12.120 U12.130
AIN1P: C14.2 R5.2 U1.16
AIN2P: C15.2 R6.2 U1.14
AIN3P: C16.2 R7.2 U1.12
AIN4P: C17.2 R8.2 U1.10
AIN5P: C18.2 R11.2 U1.8
AIN6P: C19.2 R13.2 U1.6
AIN7P: C20.2 R14.2 U1.4
AIN8P: C23.2 R15.2 U1.2
AVDD: C1.1 C2.1 C3.1 C4.1 C8.1 C9.1 C34.2 D3.2 P6.11 U1.19 U1.21 U1.22 U1.54 U1.56 U1.59 U7.5
AVSS: C1.2 C2.2 C3.2 C4.2 C5.2 C6.2 C10.1 C11.1 C21.2 C22.2 C24.2 C25.1 C26.2 C37.1 C38.2 D5.1 P6.12 U1.20 U1.23 U1.25 U1.32 U1.53 U1.57 U1.58 U9.5
BOOT0: R20.2 R31.2 U12.138
BOOT1: R32.2 U12.48
C\S\: P2.7 R10.2
CC2640_RX: P7.5 U10.6
CC2640_TX: P7.6 U10.7
CH340_D+: P3.3 U5.5
CH340_D-: P3.2 U5.6
D\R\D\Y\: P2.1 U1.47
DGND: C12.2 C13.2 R1.1 U1.31 U1.33 U1.38 U1.41 U1.49 U1.51
DIN: P2.11 R12.2
DOUT: P2.3 U1.43
HC05_RX: P7.9 P8.2
HC05_TX: P7.10 P8.3
IN1P: P1.1 R5.1 U2.4
IN2P: P1.2 R6.1 U2.5
IN3P: P1.3 R7.1 U2.2
IN4P: P1.4 R8.1 U2.1
IN5P: P1.5 R11.1 U3.4
IN6P: P1.6 R13.1 U3.5
IN7P: P1.7 R14.1 U3.2
IN8P: P1.8 R15.1 U3.1
LED0: D6.K U12.21
LED1: D7.K U12.22
NetC5_1: C5.1 C6.1 U1.55
NetC7_1: C7.1 R2.1 R4.2 U1.62 U1.63
NetC7_2: C7.2 R2.2 U1.61
NetC21_1: C21.1 U1.26
NetC22_1: C22.1 U1.30
NetC24_1: C24.1 U1.28
NetC25_2: C25.2 C26.1 U1.24
NetC29_2: C29.2 U5.4
NetC32_2: C32.2 U6.4
NetC35_2: C35.2 U7.4
NetC36_1: C36.1 U8.5
NetC36_2: C36.2 U8.3
NetC39_1: C39.1 C40.2 D4.2 U8.2
NetC41_1: C41.1 C42.2 U8.1 U9.2 U9.3
NetC43_2: C43.2 U9.4
NetC44_2: C44.2 U12.8 Y1.1
NetC45_2: C45.2 U12.9 Y1.2
NetC46_2: C46.2 R27.1 U12.23 Y2.1
NetC47_2: C47.2 R27.2 U12.24 Y2.2
NetC48_1: C48.1 C49.1 R29.2 U12.33
NetC51_2: C51.2 U12.106
NetC53_2: C53.2 U12.71
NetD1_2: D1.2 Q1.3 R17.2
NetD6_A: D6.A R24.2
NetD7_A: D7.A R25.2
NetD8_A: D8.A R26.2
NetF1_1: F1.1 S1.2
NetP5_2: P5.2 R21.1
NetP5_3: P5.3 R22.1
NetQ1_1: Q1.1 R18.2
NetQ1_2: Q1.2 R19.2 U5.14
NetQ2_1: Q2.1 R19.1
NetQ2_3: Q2.3 R20.1
NetR3_2: R3.2 U1.52
NetR9_1: R9.1 U1.40
NetR10_1: R10.1 U1.39
NetR12_1: R12.1 U1.34
NetR18_1: R18.1 U5.13
NetR23_2: R23.2 U12.143
nRF_RX: P7.1 U11.18
nRF_TX: P7.2 U11.19
P\W\D\N\: P2.9 U1.35 U1.36
PC0: P2.2 U12.26
PC1: P2.8 U12.27
PC2: P2.10 U12.28
PD0: U11.4 U12.114
PD1: U11.5 U12.115
PD2: U11.21 U12.116
PD3: U11.20 U12.117
PE14: U10.16 U12.67
PE15: U10.17 U12.68
REF: P1.9 R16.1 U4.1
RESET: C50.2 D1.1 R28.2 S2.1 U12.25
RL: P1.10 R4.1 U4.2
SCLK: P2.5 R9.2
SPI3_MISO: P2.4 U12.134
SPI3_MOSI: P2.12 U12.135
SPI3_SCK: P2.6 U12.133
SRB1: C14.1 C15.1 C16.1 C17.1 C18.1 C19.1 C20.1 C23.1 R16.2 U1.17
SWCLK: P9.3 U12.109
SWDIO: P9.2 U12.105
USART1_RX: U5.2 U12.102
USART1_TX: U5.3 U12.101
USART2_RX: P7.4 P7.8 U12.37
USART2_TX: P7.3 P7.7 U12.36
USB_5V: F1.2 P3.1 P4.1 P5.1
USB_D+: R22.2 U12.104
USB_D-: R21.2 U12.103
VBAT: D9.2 P6.10
VBAT_IN: C52.1 D9.3 U12.6
VCC: C27.1 C28.1 C30.2 C33.2 D4.1 P6.1 P6.3 P8.5 S1.1 U5.16 U6.1 U6.3 U7.1 U7.3
VCC3.3: C12.1 C13.1 C31.2 C56.2 C57.2 C58.2 C59.2 C60.2 C61.2 C62.2 C63.2 C64.2 C65.2 C66.2 C67.2 D2.2 D9.1 P6.5 P6.7 P9.1 Q2.2 R3.1 R17.1 R23.1 R24.1 R25.1 R26.1 R28.1 R29.1 U1.48 U1.50 U6.5 U10.29 U11.17 U12.17 U12.30 U12.39 U12.52 U12.62 U12.72 U12.84 U12.95 U12.108 U12.121 U12.131 U12.144
VREF: P6.9 R30.2
VREF+: C54.2 C55.2 R30.1 U12.32
pads on no net: P3. P3.4 P3.6 P5. P5.4 P5.6 P8.1 P8.6 S1.3 S1.4 S1.5 S1.6 S2. U1.1 U1.3 U1.5 U1.7 U1.9 U1.11 U1.13 U1.15 U1.18 U1.27 U1.29 U1.37 U1.42 U1.44 U1.45 U1.46 U1.60 U1.64 U2.6 U3.6 U4.4 U4.5 U4.6 U5.7 U5.8 U5.9 U5.10 U5.11 U5.12 U5.15 U10.4 U10.5 U10.8 U10.9 U10.10 U10.11 U10.12 U10.13 U10.14 U10.15 U10.18 U10.19 U10.20 U10.21 U10.22 U10.23 U10.24 U10.25 U10.26 U10.28 U10.30 U10.31 U10.32 U10.33 U10.34 U10.35 U10.36 U10.37 U10.38 U10.39 U11.2 U11.3 U11.6 U11.7 U11.8 U11.10 U11.11 U11.12 U11.13 U11.14 U11.15 U11.22 U11.23 U11.24 U12.1 U12.2 U12.3 U12.4 U12.5 U12.7 U12.10 U12.11 U12.12 U12.13 U12.14 U12.15 U12.18 U12.19 U12.20 U12.29 U12.34 U12.35 U12.40 U12.41 U12.42 U12.43 U12.44 U12.45 U12.46 U12.47 U12.49 U12.50 U12.53 U12.54 U12.55 U12.56 U12.57 U12.58 U12.59 U12.60 U12.63 U12.64 U12.65 U12.66 U12.69 U12.70 U12.73 U12.74 U12.75 U12.76 U12.77 U12.78 U12.79 U12.80 U12.81 U12.82 U12.85 U12.86 U12.87 U12.88 U12.89 U12.90 U12.91 U12.92 U12.93 U12.96 U12.97 U12.98 U12.99 U12.100 U12.110 U12.111 U12.112 U12.113 U12.118 U12.119 U12.122 U12.123 U12.124 U12.125 U12.126 U12.127 U12.128 U12.129 U12.132 U12.136 U12.137 U12.139 U12.140 U12.141 U12.142

## Silkscreen, mask and mechanical layers (free items; w line width, h text height)
Mechanical 1:
  the board outline again, w20

## Dimensions
0,0 to 0,3149.61 on Mechanical 1
0,0 to 3937.01,0 on Mechanical 1

## Text inside footprints (layer, text, board x,y; h text height)
P2: Top Overlay "12" at 2200,2050 h50 r90; Top Overlay "1" at 2300,2090 h50 r90; Top Overlay "1" at 2300,2050 h50 r90; Top Overlay "1" at 2300,1370 h50 r90; Top Overlay "2" at 2200,1370 h50 r90
P3: Top Overlay "+" at 4984.26,2196.2 h39.37 r90
P5: Top Overlay "+" at 4790.67,3056.2 h39.37 r90
P6: Top Overlay "12" at 2878.94,-677.98 h50 r90; Top Overlay "1" at 2978.94,-637.98 h50 r90; Top Overlay "1" at 2978.94,-677.98 h50 r90; Top Overlay "1" at 2978.94,-1357.98 h50 r90; Top Overlay "2" at 2878.94,-1357.98 h50 r90
P7: Top Overlay "10" at 4728.47,-462.98 h50 r90; Top Overlay "9" at 4828.47,-462.98 h50 r90; Top Overlay "1" at 4828.47,-1002.98 h50 r90; Top Overlay "2" at 4728.47,-1022.98 h50 r90